# Altium PCB main.PcbDoc
Units mm, origin at the board's own origin, x right, y up, seen from the top; angles counter-clockwise.
Board outline 64 x 25 mm, 2 copper layers (Top Layer, Bottom Layer); 33 components, 22 nets, 95 pads, 20 vias.
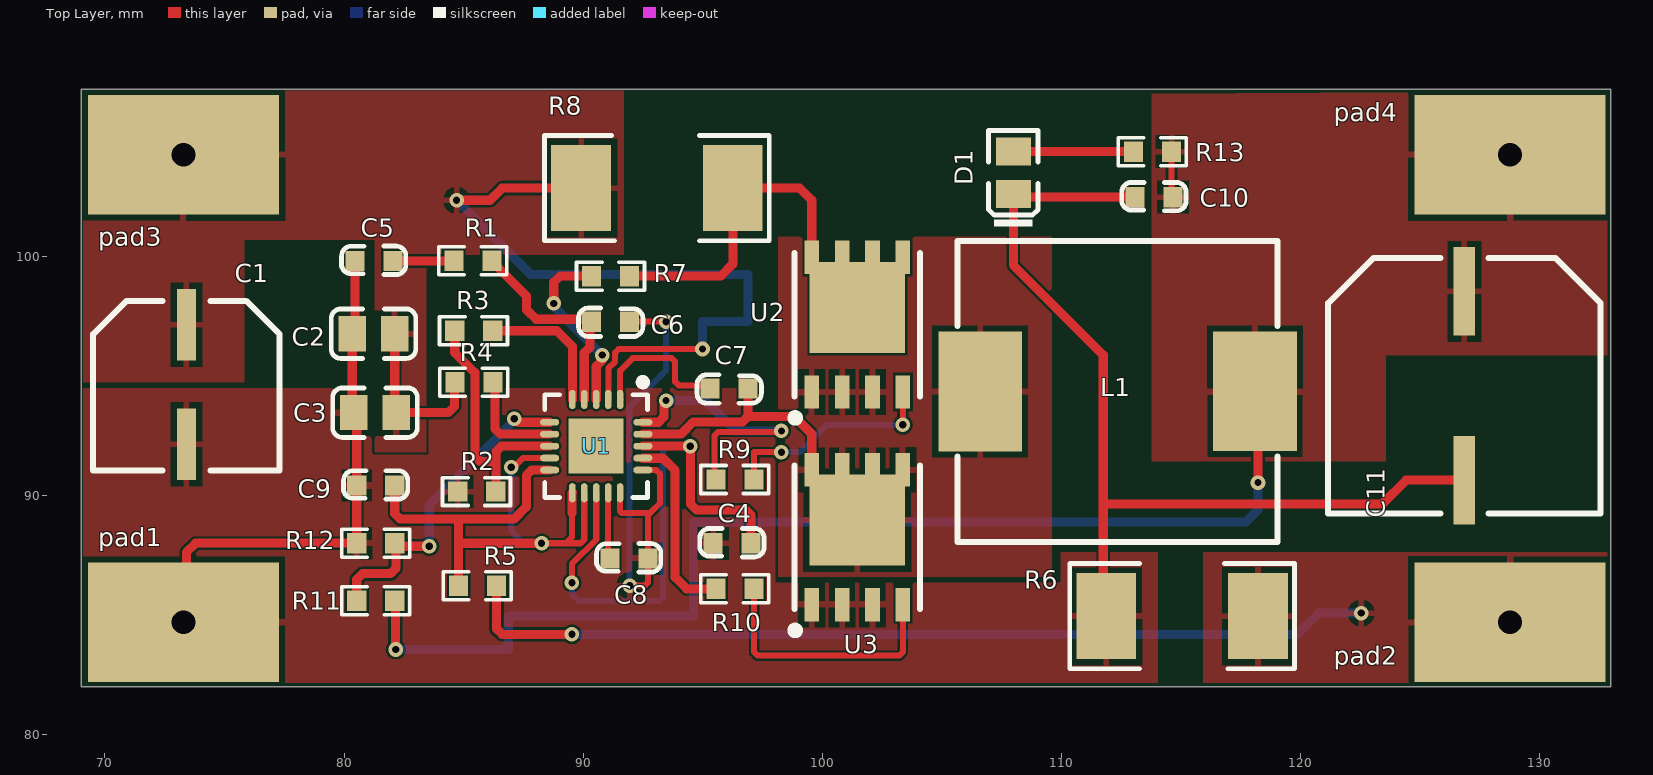
[diagram p0: Top Layer view]
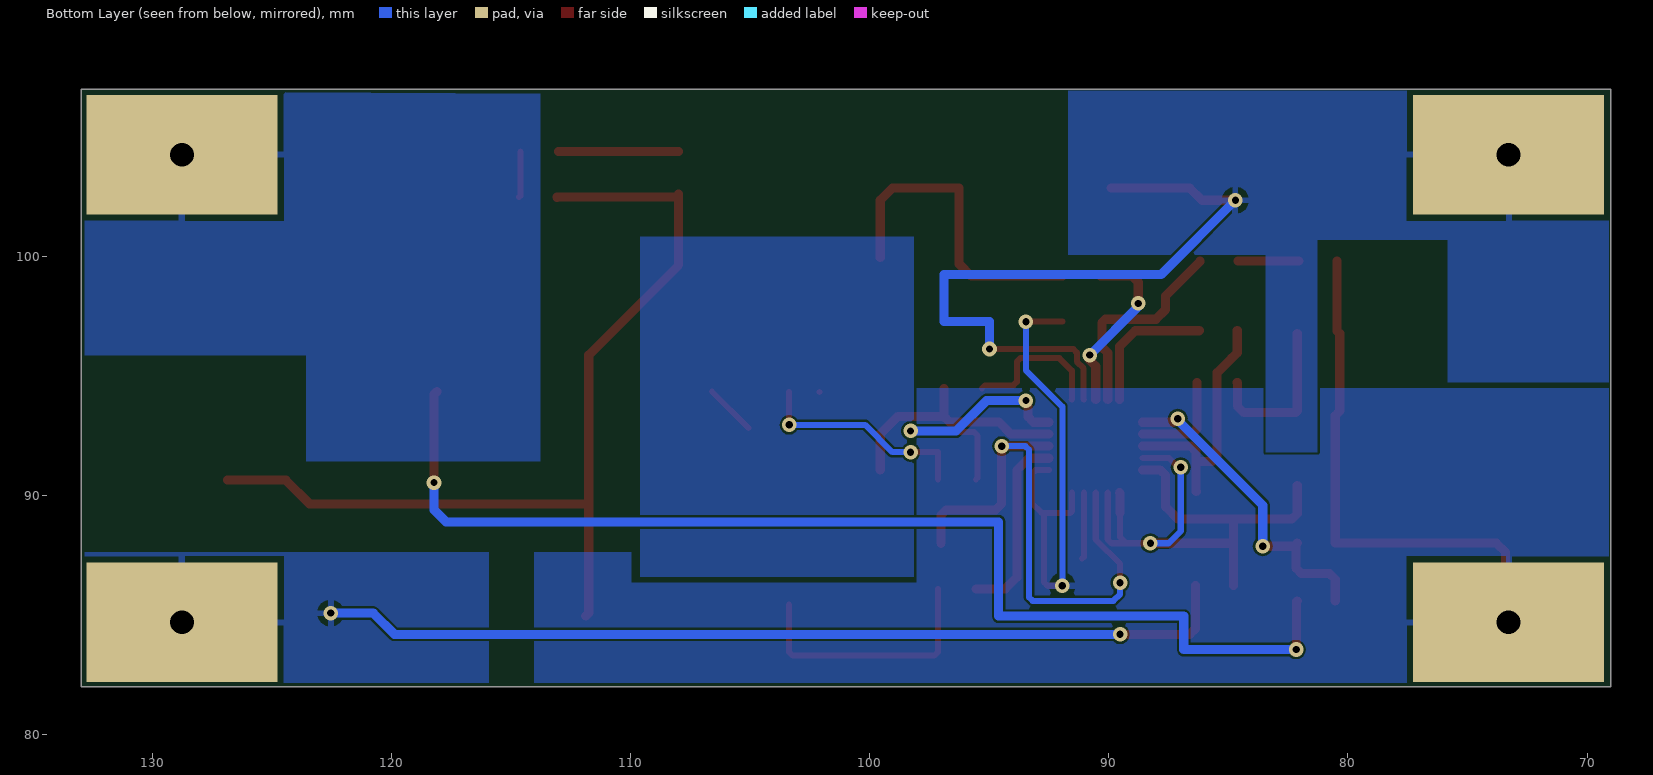
[diagram p1: Bottom Layer view, seen from below]
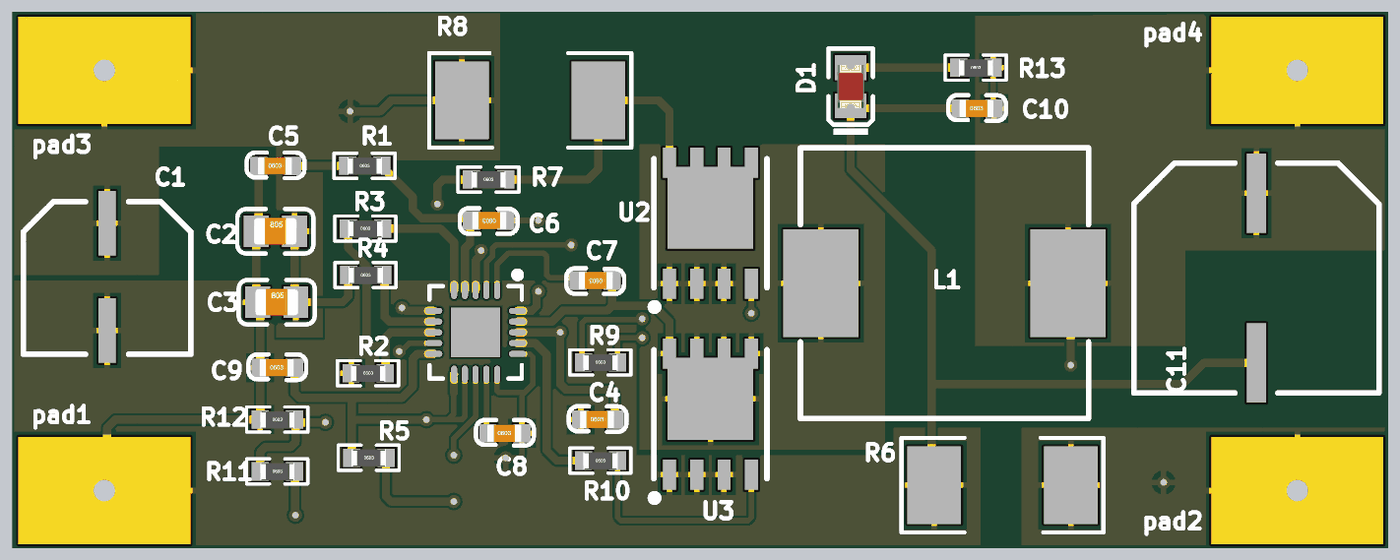
[diagram p2: 3D render of the assembled board from above, using the file's embedded part models]

## Layer stack, top to bottom
Top Solder: solder mask 0.0102, Solder Resist, Dk 3.5
Top Layer: signal copper 0.0356
Dielectric 1: dielectric 0.32, FR-4, Dk 4.8
Bottom Layer: signal copper 0.0356
Bottom Solder: solder mask 0.0102, Solder Resist, Dk 3.5

## Board outline
69,82 69,107 133,107 133,82

## Design rules (kind name [scope] priority, off if disabled: settings)
Clearance [All] p1: gap=0.102 ignorepadtopadclearanceinfootprint=FALSE
PolygonConnect [All] p1: connectstyle=Relief reliefconductorwidth=0.254 reliefentries=4 polygonreliefangle="90 Angle" airgapwidth=0.254
RoutingVias [All] p1: holewidth=0.356 width=1.27 viastyle="Through Hole" minholewidth=0.254 minwidth=1.27 maxholewidth=0.254 maxwidth=1.27
SolderMaskExpansion [All] p1: expansion=0.102
Width [All] p1: maxlimit=1.27 minlimit=0.102 preferedwidth=0.254
30 further rules are at their usual default settings.

## Components (designator, comment, footprint, x,y, rotation, side; value= is the part's Value field where it differs from the comment)
C1 "100uF" SMD_6.3*7.7 73.406,92.155 r0 top
C2 "10uF" 0805_C 81.233,96.779 r0 top
C3 "0.1uF" 0805_C 81.297,93.477 r0 top
C4 "1uF" 0603_C 96.201,88.011 r0 top
C5 "2.2nF" 0603_C 81.215,99.822 r0 top
C6 "220pF" 0603_C 91.186,97.282 r180 top
C7 "100nF" 0603_C 96.139,94.488 r180 top
C8 "100nF" 0603_C 91.883,87.376 r0 top
C9 "4.7uF" 0603_C 81.296,90.429 r0 top
C10 "4.7uF" 0603_C 113.854,102.489 r0 top
C11 "330uF" SMD_10*10.2 126.873,90.652 r0 top
D1 "LED" LED_0805 108,103.51 r270 top
L1 "Inductor" SRP1265A-220M 110.277,94.234 r0 top value=22uH
pad1 "gnd" PAD8*5 73.279,84.709 r180 top
pad2 "gnd_out" PAD8*5 128.778,84.709 r180 top
pad3 "VIN" PAD8*5 73.279,104.267 r180 top
pad4 "VOUT" PAD8*5 128.778,104.267 r180 top
R1 "300K" 0603-R 85.392,99.827 r0 top
R2 "39K" 0603-R 85.552,90.175 r0 top
R3 "20K" 0603-R 85.425,96.906 r0 top
R4 "1M" 0603-R 85.438,94.742 r0 top
R5 "4.7" 0603-R 85.585,86.238 r0 top
R6 "0.005" 2512 115.062,84.963 r0 top
R7 "20" 0603-R 91.153,99.187 r0 top
R8 "0.005" 2512 93.091,102.87 r180 top
R9 "2.2" 0603-R 96.36,90.678 r0 top
R10 "2.2" 0603-R 96.36,86.106 r0 top
R11 "20k" 0603-R 81.328,85.603 r0 top
R12 "6.3k" 0603-R 81.328,88.016 r0 top
R13 "10K" 0603-R 113.825,104.394 r0 top
U1 "TD8655" LC-QFN-20_4x4x05P 90.551,92.075 r180 top
U2 "TDM3436" LC-DFN-8_5x6mm#1 101.473,97.155 r0 top
U3 "TDM3436" LC-DFN-8_5x6mm#2 101.473,88.265 r0 top

## Footprints (in the part's own frame and the unit in brackets; to place one, negate y for a bottom-side part, rotate by r counter-clockwise, add the part's x,y. Pads: shape width x height; smd on the part's side, far side on the other; paste and mask are expansions set on the pad)
0603-R [mm]
  rect 0.8x0.85 smd: 1(-0.795,0) 2(0.795,0)
  silkscreen extent -1.43,-0.58 1.42,0.58, body extent -0.8,-0.41 0.8,0.39, height 0.4
0603_C [mm]
  rect 0.8x0.85 smd: 1(-0.762,0) 2(0.827,0)
  silkscreen extent -1.32,-0.57 1.37,0.62, body extent -0.8,-0.41 0.8,0.41, height 0.81
0805_C [mm]
  rect 1.16x1.47 smd: 1(-0.89,0) 2(0.89,0)
  silkscreen extent -1.77,-1.04 1.77,1.04, body extent -1,-0.62 1,0.63, height 0.77
2512 [mm] "保险丝"
  rect 2.5x3.6 smd: 1(-3.175,0) 2(3.175,0)
  silkscreen extent -4.7,-2.2 4.7,2.2, body extent -3.17,-1.65 3.17,1.65, height 1.2
LC-DFN-8_5x6mm#1 [mm]
  rect 0.61x1.4 smd: 1(-1.905,-2.816) 2(-0.635,-2.816) 3(0.635,-2.816) 4(1.905,-2.816) 5(1.905,2.816) 6(0.635,2.816) 7(-0.635,2.816) 8(-1.905,2.816)
  rect 4x3.81 smd: ""(0,0.716)
  silkscreen extent -2.72,-4.02 2.63,3
LC-DFN-8_5x6mm#2 [mm]
  rect 4x3.81 smd: 0(0,0.716)
  rect 0.61x1.4 smd: 1(-1.905,-2.816) 2(-0.635,-2.816) 3(0.635,-2.816) 4(1.905,-2.816) 5(1.905,2.816) 6(0.635,2.816) 7(-0.635,2.816) 8(-1.905,2.816)
  silkscreen extent -2.72,-4.02 2.63,3
LC-QFN-20_4x4x05P [mm]
  rect 2.3x2.3 smd mask+0.051: 0(0,0)
  oval 0.28x0.8 smd mask+0.051: 1(-1,-1.95) 2(-0.5,-1.95) 3(0,-1.95) 4(0.5,-1.95) 5(1,-1.95) 11(1,1.95) 12(0.5,1.95) 13(0,1.95) 14(-0.5,1.95) 15(-1,1.95)
  oval 0.8x0.28 smd mask+0.051: 6(1.95,-1) 7(1.95,-0.5) 8(1.95,0) 9(1.95,0.5) 10(1.95,1) 16(-1.95,1) 17(-1.95,0.5) 18(-1.95,0) 19(-1.95,-0.5) 20(-1.95,-1)
  silkscreen extent -2.15,-2.82 2.15,2.15
LED_0805 [mm] "贴片二极管"
  rect 1.16x1.47 smd: 1(-0.89,0) 2(0.89,0)
  silkscreen extent -1.77,-1.03 2.24,1.04, body extent -1.01,-0.62 1.01,0.62, height 1.1
PAD8*5 [mm]
  rect 8x5 hole 1: 4(0,0)
SMD_6.3*7.7 [mm] "cap"
  rect 0.8x3 smd: +(0,5) -(0,0)
  silkscreen extent -3.9,-1.1 3.9,6
SMD_10*10.2 [mm]
  rect 0.9x3.7 smd: +(0,7.9) -(0,0)
  silkscreen extent -5.7,-1.4 5.7,9.3
SRP1265A-220M [mm]
  rect 3.5x5 smd: 1(-3.667,0.127) 2(7.833,0.127)
  silkscreen extent -4.62,-6.17 8.78,6.43

## Part data
C1 C11: library part CD
C2 C3 C4 C5 C6 C7 C8 C9 C10: library part C
pad1 pad2 pad3 pad4: library part pad1
R1 R2 R3 R4 R5 R6 R7 R8 R9 R10 R11 R12 R13: library part R
L1: Code_IEC=1005, Code_JEITA=0402, LatestRevisionDate=29-May-2009, LatestRevisionNote="IPC-7351 Footprint Added.", PackageDescription="Chip Inductor", PackageReference=0402-A, Published=8-Jun-2000, Publisher="Altium Limited"

## Via types
v1: diameter 0.61, hole 0.305, Top Layer to Bottom Layer, tented both sides, 20 vias

## Nets (pads, with @x,y where several pads share a name; then routed paths per layer and width w, separated by ;. In a path a pad name is that pad's centre, name@x,y a point inside that pad or via, vN(x,y) a via of type N, cw(c..) or ccw(c..) an arc to the next point about the centre after c; other vN are vias at no path point)
COMP: C6.2 R1.2 U1.4 | length 8.8
  Top Layer w0.381: R1.2 86.187,99.802 87.63,98.359 87.63,97.79 88.036,97.384 90.149,97.384 90.297,97.236 90.297,96.221 90.051,95.975 U1.4
CS34: C4.2 U1.13 U1.18 | length 24.4
  Top Layer w0.254: v1(89.535,86.36) 89.535,87.149 90.551,88.165 U1.13
  Top Layer w0.381: U1.18 v1(94.488,92.075) 94.488,89.662 94.742,89.408 96.805,89.408 97.028,89.185 C4.2
  Bottom Layer w0.254: v1(89.535,86.36) 89.535,85.874 89.811,85.598 93.196,85.598 93.345,85.747 93.345,91.926 93.494,92.075 v1(94.488,92.075)
FB: R11.1 R12.2 U1.6 | length 13.3
  Top Layer w0.381: R11.1 80.534,86.503 80.772,86.741 81.946,86.741 82.169,86.964 R12.2@82.169,87.97 ; R12.2 R12.2@82.169,87.97 ; v1(83.565,87.885) 82.254,87.885 R12.2@82.169,87.97 ; v1@87.327,93.075 U1.6
  Bottom Layer w0.381: v1(83.565,87.885) 83.565,89.599 87.122,93.156 v1(87.122,93.218)
GND: C1.- C2.1 C3.1 C4.1 C5.1 C6.1 C8.2 C9.1 C10.1 C11.- D1.2 pad1.4 R2.1 R6.1 R12.1 U1.15 U1.16 U3.1 U3.2 U3.3 | length 83.8
  Top Layer w0.254: U1.15 91.551,89.344 91.614,89.281 92.815,89.281 ; v1(91.948,86.233) 92.572,86.233 92.71,86.371 C8.2 92.71,89.176 92.815,89.281 ; C6.1 v1(93.472,97.282) ; U1.16 92.506,91.07 93.069,91.07 93.218,90.921 93.218,89.684 92.815,89.281
  Top Layer w0.381: pad1.4 73.406,84.836 73.406,87.63 73.792,88.016 R12.1 C9.1 80.534,93.35 C3.1 80.343,93.541 C2.1 80.453,96.889 C5.1 ; R6.1 111.76,85.09 111.76,89.662 ; C10.1 113.081,102.5 108.12,102.5 D1.2 108,99.645 111.76,95.885 111.76,89.662 ; C11.- 124.434,90.652 123.444,89.662 111.76,89.662
  Bottom Layer w0.254: v1(91.948,86.233) 91.948,93.726 93.472,95.25 v1(93.472,97.282)
GND_OUT: pad2.4 R5.2 R6.2 | length 38.4
  Top Layer w0.381: R5.2 86.379,84.436 86.614,84.201 v1(89.535,84.201)
  Bottom Layer w0.381: v1(89.535,84.201) 119.888,84.201 120.777,85.09 v1(122.555,85.09)
HSD: R9.1 U1.20 | length 11.5
  Top Layer w0.254: R9.1 95.504,90.74 95.504,92.523 95.653,92.672 98.26,92.672 v1(98.298,92.71)
  Top Layer w0.381: U1.20 93.16,93.075 93.383,93.298 v1@93.383,93.726
  Bottom Layer w0.381: v1(93.472,93.98) 95.123,93.98 96.393,92.71 v1(98.298,92.71)
ISENSE: R7.1 U1.3 | length 7.5
  Top Layer w0.381: v1(88.773,98.044) 88.773,98.933 89.027,99.187 R7.1 ; U1.3 90.551,95.417 90.805,95.671 v1(90.805,95.885)
  Bottom Layer w0.381: v1(88.773,98.044) 88.773,97.917 v1(90.805,95.885)
ISET: R2.2 R3.1 U1.8 | length 10.6
  Top Layer w0.381: R3.1 84.63,95.981 84.853,95.758 84.866,95.758 85.471,95.153 85.471,91.663 85.694,91.44 86.36,91.44 ; R2.2 86.36,90.188 86.36,91.44 ; U1.8 86.583,92.075 86.36,91.852 86.36,91.44
LSD: R10.1 U1.17 | length 8
  Top Layer w0.381: U1.17 92.509,91.567 93.345,91.567 93.853,91.059 93.853,86.583 94.33,86.106 R10.1
NetC5_2: C5.2 R1.1 | length 2.6
  Top Layer w0.381: C5.2 82.044,99.824 84.595,99.824 R1.1
NetC7_2: C7.2 U1.1 | length 6.2
  Top Layer w0.254: U1.1@91.556,94.03 U1.1 91.551,95.234 92.075,95.758 93.704,95.758 93.853,95.609 93.853,94.764 94.002,94.615 95.185,94.615 C7.2
NetC8_1: C8.1 U1.14 | length 2.8
  Top Layer w0.254: U1.14 91.051,87.446 C8.1
NetC9_2: C9.2 R5.1 U1.9 U1.10 U1.11 U1.12 | length 27.6
  Top Layer w0.254: v1(86.995,91.186) 87.091,91.186 87.48,91.575 U1.9 ; v1(88.265,88.011) 89.281,88.011 ; 89.535,89.281 89.535,88.265 89.281,88.011 ; U1.12 90.051,88.168 89.894,88.011 89.281,88.011
  Top Layer w0.381: C9.2 82.123,89.25 82.346,89.027 84.734,89.027 ; R5.1 84.79,88.011 ; v1(88.265,88.011) 84.79,88.011 ; U1.10 87.853,91.075 87.63,90.852 87.63,89.535 87.122,89.027 84.734,89.027 ; 89.535,89.281 89.535,90.109 U1.11 ; 84.734,89.027 84.79,88.971 84.79,88.011
  Bottom Layer w0.254: v1(86.995,91.186) 86.995,88.519 87.503,88.011 v1(88.265,88.011)
NetD1_1: D1.1 R13.1 | length 5
  Top Layer w0.381: D1.1 113.024,104.4 R13.1
NetR3_2: R3.2 U1.5 | length 5.8
  Top Layer w0.381: R3.2 86.225,96.901 88.9,96.901 89.551,96.25 U1.5
NetR4_2: R4.2 U1.7 | length 4.3
  Top Layer w0.381: R4.2@86.314,94.742 86.314,92.798 86.537,92.575 U1.7
NetR7_2: R7.2 R8.1 U2. U2.5 U2.6 U2.7 U2.8 | length 13.6
  Top Layer w0.381: R7.2 95.758,99.187 96.266,99.695 R8.1 99.06,102.87 99.568,102.362 U2.8
NetR9_2: R9.2 U2.4 | length 9.2
  Top Layer w0.254: R9.2 97.155,91.821 v1(98.298,91.821) ; v1(103.378,92.964) U2.4
  Bottom Layer w0.254: v1(98.298,91.821) 99.06,91.821 100.203,92.964 v1(103.378,92.964)
NetR10_2: R10.2 U3.4 | length 11
  Top Layer w0.254: R10.2 97.155,83.461 97.304,83.312 103.229,83.312 103.378,83.461 U3.4
SW: C7.1 L1.1 U1.19 U2.1 U2.2 U2.3 U3.0 U3.5 U3.6 U3.7 U3.8 | length 12.5
  Top Layer w0.254: L1.1@105.086,92.837 L1.1
  Top Layer w0.381: U1.19 94.099,92.575 94.615,93.091 96.678,93.091 96.901,93.314 ; C7.1 96.901,93.314 ; U3.8 99.568,92.583 98.837,93.314 96.901,93.314
VIN: C1.+ C2.2 C3.2 pad3.4 R4.1 R8.2 U1.2 | length 36.6
  Top Layer w0.254: U1.2 91.056,94.03 91.056,95.329 91.338,95.612 91.338,95.99 91.487,96.139 v1(94.996,96.139)
  Top Layer w0.381: C2.2 82.123,93.541 C3.2 84.359,93.477 84.627,93.745 84.627,94.726 R4.1 ; v1(84.709,102.362) 86.106,102.362 86.614,102.87 R8.2
  Bottom Layer w0.381: v1(84.709,102.362) 87.821,99.25 96.901,99.25 96.901,97.282 94.996,97.282 v1(94.996,96.139)
VOUT: C10.2 C11.+ L1.2 pad4.4 R11.2 R13.2 | length 50.6
  Top Layer w0.254: R13.2 114.619,102.551 C10.2
  Top Layer w0.381: R11.2 82.146,85.58 82.146,83.589 v1(82.169,83.566) ; L1.2 118.237,94.234 v1(118.237,90.551)
  Bottom Layer w0.381: v1(82.169,83.566) 86.868,83.566 86.868,84.963 94.615,84.963 94.615,88.9 117.729,88.9 118.237,89.408 v1(118.237,90.551)
pads on no net: U1.0

## Polygon pours and split planes (outlines as drawn)
GND on Top Layer (solid, pour order 66): 69.088,94.488 98.044,94.488 98.044,86.36 109.982,86.36 109.982,87.63 114.046,87.63 114.046,82.169 69.088,82.169
no net on Top Layer (solid, pour order 60): 98.679,77.724
SW on Top Layer (solid, pour order 56): 98.171,100.838 98.171,86.614 109.601,86.614 109.601,100.838
VIN on Top Layer (solid, pour order 38): 69.088,106.934 91.694,106.934 91.694,100.076 83.439,100.076 83.439,91.821 81.28,91.821 81.28,100.711 75.819,100.711 75.819,94.742 69.088,94.742
VOUT on Top Layer (solid, pour order 34): 113.792,106.807 113.792,91.44 123.571,91.44 123.571,95.885 132.842,95.885 132.842,106.934 132.715,106.934
no net on Top Layer "Top Layer-No Net" (solid, pour order 32): 87.757,92.329
GND_OUT on Top Layer "Top Layer-GND_OUT" (solid, pour order 28): 115.951,87.63 132.842,87.63 132.842,82.169 115.951,82.169
no net on Top Layer "Top Layer-No Net 1" (solid, pour order 16): 69.215,94.234
no net on Top Layer "Top Layer-No Net 2" (solid, pour order 6): 97.663,103.251
no net on Top Layer "Top Layer-No Net 3" (solid, pour order 4): 108.585,88.519
GND on Bottom Layer (solid, pour order 68): 69.088,94.488 98.044,94.488 98.044,86.36 109.982,86.36 109.982,87.63 114.046,87.63 114.046,82.169 69.088,82.169
SW on Bottom Layer (solid, pour order 54): 98.171,100.838 98.171,86.614 109.601,86.614 109.601,100.838
VIN on Bottom Layer (solid, pour order 40): 69.088,106.934 91.694,106.934 91.694,100.076 83.439,100.076 83.439,91.821 81.28,91.821 81.28,100.711 75.819,100.711 75.819,94.742 69.088,94.742
VOUT on Bottom Layer (solid, remove dead copper, pour order 36): 113.792,106.807 113.792,91.44 123.571,91.44 123.571,95.885 132.842,95.885 132.842,106.934 132.715,106.934
GND_OUT on Bottom Layer "Bottom Layer-GND_OUT" (solid, pour order 30): 115.951,87.63 132.842,87.63 132.842,82.169 115.951,82.169

## Silkscreen, mask and mechanical layers (free items; w line width, h text height)
Mechanical 1:
  the board outline again, w0.254